# EAGLE board RPi_RN2483backup (EAGLE 7.6.0)
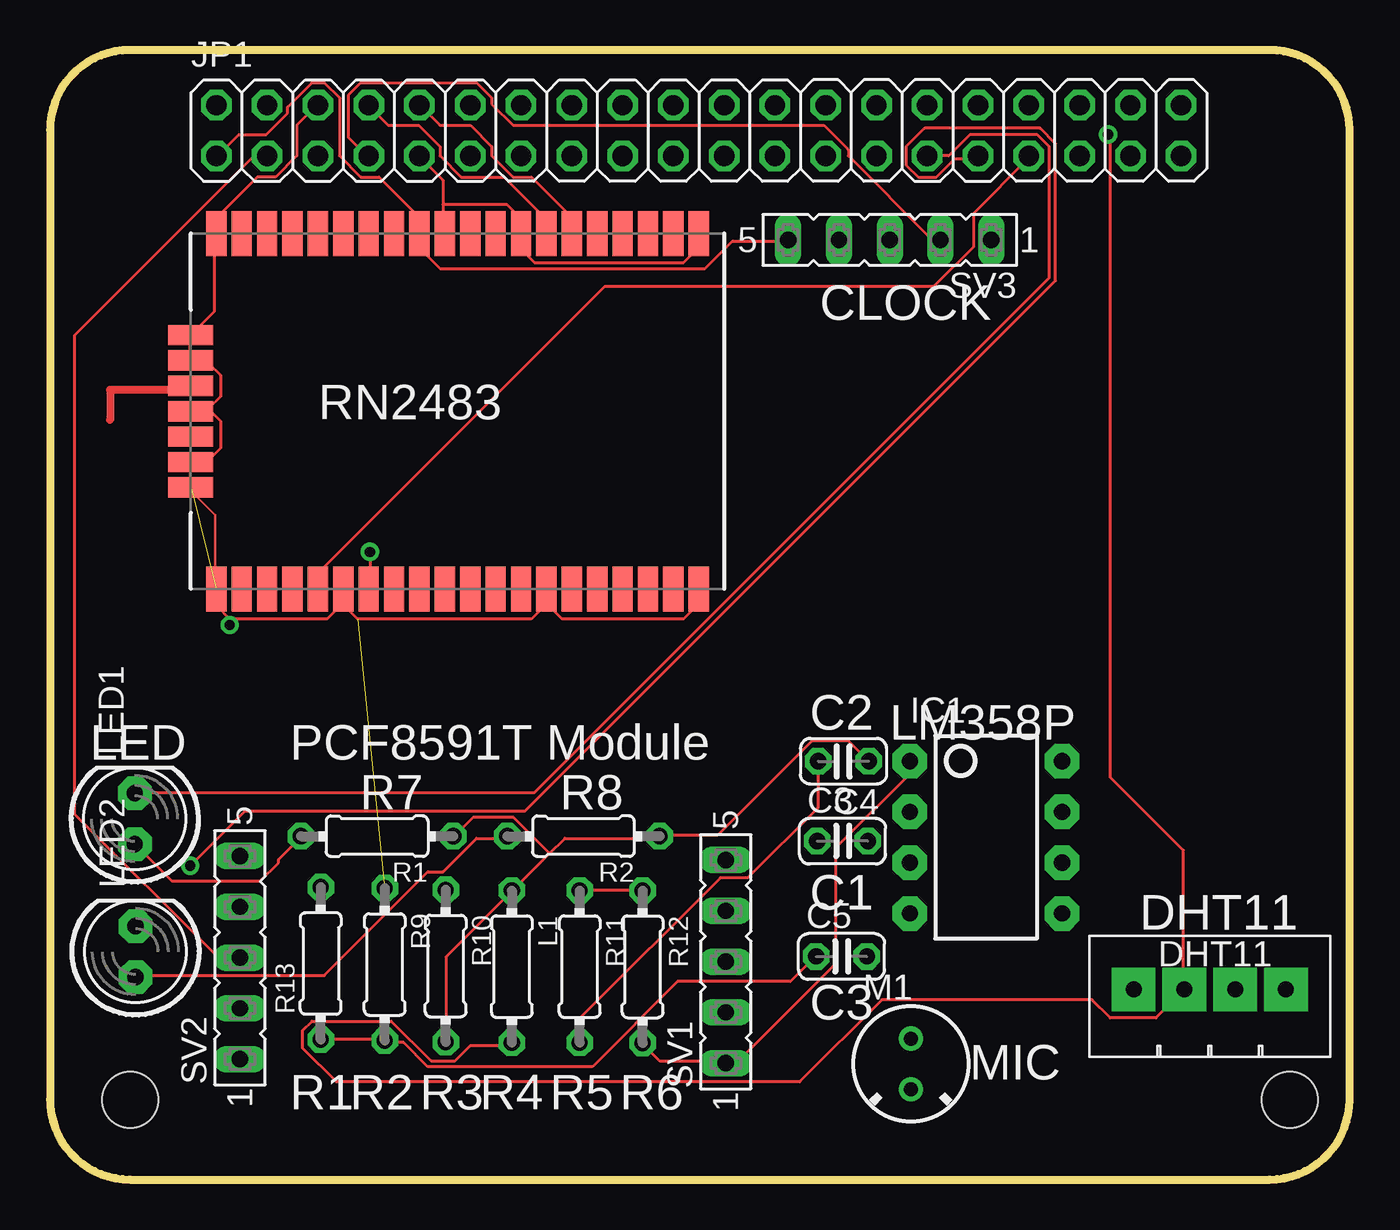
[diagram p0: board, top side]
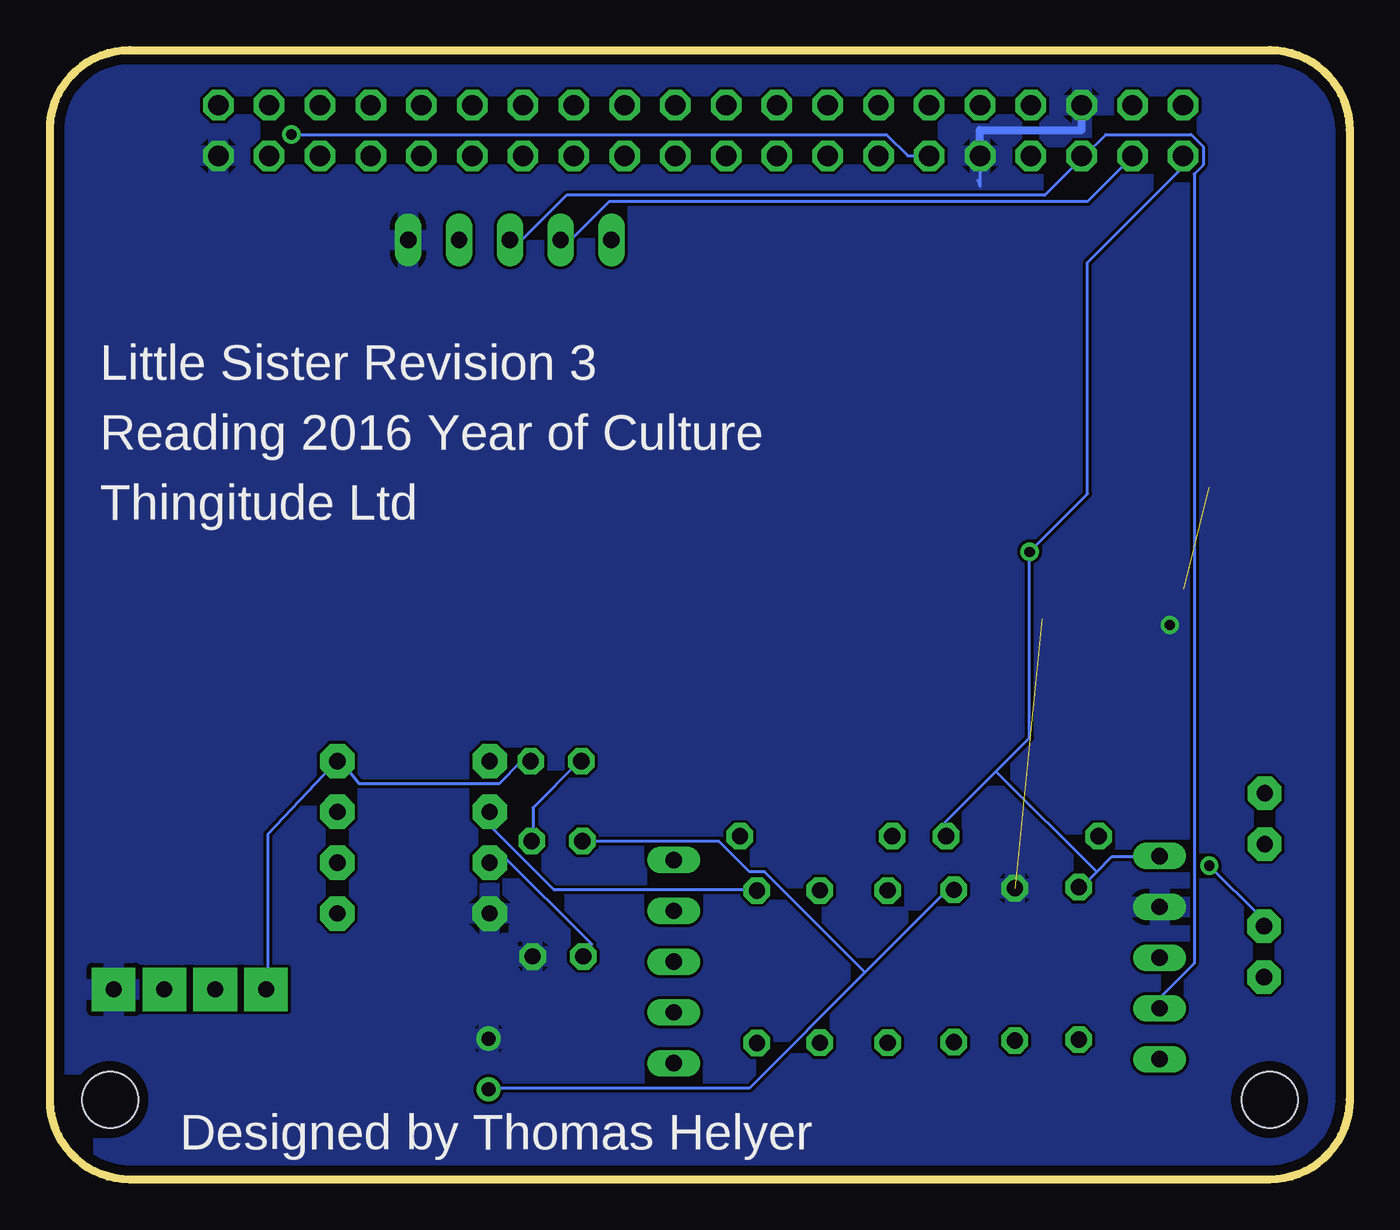
[diagram p1: board, bottom side, seen from below]

Size 65 x 56.5 mm. Coordinates in mm from the lower left corner, seen from the top.
Outline: 0,52.5 0,4 arc90 4,0 61,0 arc90 65,4 65,52.5 arc90 61,56.5 4,56.5 arc90 0,52.5
Copper layers (1*16): Top 0.035mm / dielectric 1.5mm / Bottom 0.035mm
Design rules "Ragworm": minimum track width 6mil, minimum drill 20mil, track to track 6mil, track to pad 6mil, pad to pad 6mil, via to via 6mil, smd to smd 6mil, copper to edge 20mil, drill to drill 8mil, minimum pad ring 10mil, minimum via ring 8mil, stop-mask expansion 4mil, vias tented up to drill 0mil, thermal gap 10mil
Holes 2.8 mm at 4,4 62,4

## Footprints (pad centres in the part's own frame; a part is rotated, then mirrored left to right if it is on the bottom)
C025-024X044 = drill 0.813 octagon: 1 -1.27,0; 2 1.27,0
DIP08 = drill 0.813 pad 1.727 octagon: 1 -3.81,-3.81; 2 -1.27,-3.81; 3 1.27,-3.81; 4 3.81,-3.81; 5 3.81,3.81; 6 1.27,3.81; 7 -1.27,3.81; 8 -3.81,3.81
2X20 = drill 1.016 octagon: 1 -24.13,-1.27; 2 -24.13,1.27; 3 -21.59,-1.27; 4 -21.59,1.27; 5 -19.05,-1.27; 6 -19.05,1.27; 7 -16.51,-1.27; 8 -16.51,1.27; 9 -13.97,-1.27; 10 -13.97,1.27; 11 -11.43,-1.27; 12 -11.43,1.27; 13 -8.89,-1.27; 14 -8.89,1.27; 15 -6.35,-1.27; 16 -6.35,1.27; 17 -3.81,-1.27; 18 -3.81,1.27; 19 -1.27,-1.27; 20 -1.27,1.27; 21 1.27,-1.27; 22 1.27,1.27; 23 3.81,-1.27; 24 3.81,1.27; 25 6.35,-1.27; 26 6.35,1.27; 27 8.89,-1.27; 28 8.89,1.27; 29 11.43,-1.27; 30 11.43,1.27; 31 13.97,-1.27; 32 13.97,1.27; 33 16.51,-1.27; 34 16.51,1.27; 35 19.05,-1.27; 36 19.05,1.27; 37 21.59,-1.27; 38 21.59,1.27; 39 24.13,-1.27; 40 24.13,1.27
0204/7 = drill 0.813 octagon: 1 -3.81,0; 2 3.81,0
LED5MM = drill 0.813 pad 1.676 octagon: A -1.27,0; K 1.27,0
F6050AP = drill 0.7 pad 1.2: 1 0,1.27; 2 0,-1.27
FE05-1 = drill 0.813 long: 1 -5.08,0; 2 -2.54,0; 3 0,0; 4 2.54,0; 5 5.08,0
RN2483 = smd 2.25 x 1.016: GND 17.78,1.27; GND2 17.78,10.16; GND3 17.78,13.97; GND4 17.78,25.4; GND10 0,25.4; GND11 0,19.05; GND12 0,8.89; GND13 0,1.27; GPIO0 0,16.51; GPIO1 0,15.24; GPIO2 0,13.97; GPIO3 0,12.7; GPIO4 0,11.43; GPIO5 0,10.16; GPIO6 0,6.35; GPIO7 0,5.08; GPIO8 0,3.81; GPIO9 0,2.54; GPIO10 17.78,17.78; GPIO11 17.78,16.51; GPIO12 17.78,12.7; GPIO13 17.78,11.43; NC1 17.78,19.05; NC2 17.78,20.32; NC3 17.78,21.59; NC4 17.78,22.86; NC5 17.78,24.13; NC6 0,24.13; NC7 0,7.62; RESERVED1 17.78,5.08; RESERVED2 17.78,6.35; RESET 0,20.32; TEST0 0,22.86; TEST1 0,21.59; UART_CTS 17.78,3.81; UART_RTS 17.78,2.54; UART_RX 17.78,8.89; UART_TX 17.78,7.62; VDD1 17.78,15.24; VDD2 0,17.78 | smd 1.016 x 2.25: GND5 12.7,26.67; GND6 11.43,26.67; GND7 8.89,26.67; GND8 6.35,26.67; GND9 5.08,26.67; RFH 10.16,26.67; RFL 7.62,26.67
DHT11-PION. = drill 0.8 pad 2.184 square: DATA -1.27,0.305; GND 3.81,0.305; NO 1.27,0.305; VCC -3.81,0.305

## Placement (x,y rotation side)
C3  [C025-024X044]  39.64,16.93 0 top
C4  [C025-024X044]  39.69,20.92 180 top
C5  [C025-024X044]  39.59,11.16 0 top
IC1  LM358  [DIP08]  46.82,17.12 270 top
JP1  [2X20]  32.45,52.47 0 top
L1  [0204/7]  23.1,10.65 270 top
LED1  [LED5MM]  4.24,18.05 90 top
LED2  [LED5MM]  4.28,11.4 90 top
M1  ELECTRET_MICROPHON-F6050AP  [F6050AP]  43.06,5.78 0 top
R1  [0204/7]  16.36,17.17 180 top
R2  [0204/7]  26.68,17.17 180 top
R9  [0204/7]  16.74,10.76 270 top
R10  [0204/7]  19.79,10.68 270 top
R11  [0204/7]  26.49,10.65 270 top
R12  [0204/7]  29.64,10.64 270 top
R13  [0204/7]  13.54,10.81 90 top
SV1  [FE05-1]  33.8,10.9 90 top
SV2  [FE05-1]  9.5,11.1 90 top
SV3  [FE05-1]  42,47 180 top
U$1  RN2483  [RN2483]  33.72,29.54 90 top
U$3  DHT11-PION.  [DHT11-PION.]  58.01,9.2 0 top

## Library data of the parts
C3-C5 L1 R1 R2 R9-R13 = resistor
IC1 = SparkFun-AnalogIC; PROD_ID: IC-09172
JP1 LED1 LED2 = adafruit
M1 = microphon
SV1-SV3 = con-lsta; OC_FARNELL: unknown; OC_NEWARK: unknown
U$1 = RN2483
U$3 = DHT11

## Nets
+3V3: C4.1 IC1.8 JP1.1 L1.1 R1.1 R2.1 R10.2 R13.2 SV2.5 SV3.5 U$1.VDD1 U$1.VDD2 U$3.VCC
GPIO5: JP1.29 LED1.K
GPIO6: JP1.31 LED2.K
GROUND: C5.2 IC1.4 JP1.6 JP1.9 JP1.39 M1.1 R9.1 SV2.4 SV3.1 U$1.GND U$1.GND2 U$1.GND3 U$1.GND4 U$1.GND5 U$1.GND6 U$1.GND7 U$1.GND8 U$1.GND9 U$1.GND10 U$1.GND11 U$1.GND12 U$1.GND13 U$3.GND
N$1: LED1.A R1.2
N$2: LED2.A R2.2
N$7: U$1.RFL
N$10: JP1.11 L1.2 U$3.DATA
N$12: IC1.2 R11.1 R12.1
N$13: JP1.33 U$1.RESET
N$15: JP1.5 SV2.2 SV3.3
N$16: JP1.3 SV2.3 SV3.4
N$18: IC1.1 R12.2 SV1.1
N$20: JP1.7 SV3.2
N$22: C3.1 M1.2 R10.1
N$23: C3.2 C4.2 R11.2
N$24: C5.1 IC1.3 R9.2 R13.1
RFH: U$1.RFH
UART_RX: JP1.8 U$1.UART_RX
UART_TX: JP1.10 U$1.UART_TX

## Tracks (layer width: path | path; a pad name or v marks a point on that pad's centre or on a via)
+3V3  (via drill 0.51)
  Top 0.152: JP1.1 8.38,51.21 9.45,52.27 10.82,52.27 11.89,53.34 11.89,53.65 13.11,54.86 13.72,54.86 14.48,54.1 14.48,51.21 15.54,50.14 16.46,50.14 18.44,48.16 18.44,47.4 U$1.VDD1 18.59,47.24 18.59,46.48 19.51,45.57 32.77,45.57 34.14,46.94 36.88,46.94 SV3.5 | R10.2 19.81,7.01 19.81,11.12 23.01,14.33 L1.1 23.16,14.48 24.99,16.31 | 24.99,16.31 25.76,17.07 30.48,17.07 R2.1 30.63,17.22 33.38,17.22 38.1,21.95 39.93,21.95 40.84,21.03 C4.1 | v16,31.39 16,29.57 U$1.VDD2 | 24.99,16.31 23.16,18.14 21.18,18.14 20.27,17.22 R1.1
  Bottom 0.152: 17.68,20.42 20.27,17.83 20.27,17.22 R1.1 | 17.68,20.42 16,22.1 v16,31.39 13.11,34.29 13.11,45.87 8.38,50.6 8.38,51.05 JP1.1 | 12.65,15.39 13.41,14.63 R13.2 | 12.65,15.39 11.89,16.15 9.6,16.15 SV2.5 | 17.68,20.42 12.65,15.39 | 50.54,21.07 50.6,20.88 IC1.8 50.54,21.07 | 50.54,21.07 49.53,19.81 42.52,19.81 41.45,20.88 41,20.88 C4.1 | 50.54,21.07 54.1,17.26 54.1,9.6 U$3.VCC
GPIO5
  Top 0.152: JP1.29 44.96,51.21 46.02,52.27 49.38,52.27 49.99,51.66 49.99,45.11 24.23,19.36 4.27,19.36 LED1.K
GPIO6  (via drill 0.51)
  Top 0.152: v7.01,15.7 9.75,18.44 23.77,18.44 50.29,44.96 50.29,51.82 49.53,52.58 43.74,52.58 42.82,51.66 42.82,50.75 43.43,50.14 44.35,50.14 45.26,51.05 46.33,51.05 JP1.31
  Bottom 0.152: v7.01,15.7 4.42,13.11 4.42,12.8 LED2.K
GROUND  (via drill 0.51)  (2 unrouted)
  Top 0.152: U$1.GND9 7.01,34.75 7.01,35.81 U$1.GND8 7.16,35.97 7.92,35.97 8.53,36.58 8.53,37.95 7.92,38.56 | U$1.GND 32.31,47.24 32.31,46.48 31.7,45.87 24.23,45.87 23.62,46.48 23.62,47.24 U$1.GND2 23.47,47.4 23.47,48.16 22.86,48.77 19.66,48.77 | 19.66,48.77 19.66,49.99 18.59,51.05 JP1.9 | 19.66,48.77 19.66,47.4 U$1.GND3 | 7.92,38.56 7.16,38.56 U$1.GND7 7.92,38.56 | 7.92,38.56 8.53,39.17 8.53,40.23 7.92,40.84 7.16,40.84 U$1.GND6 7.01,41 7.01,42.22 U$1.GND5 7.16,42.37 8.23,43.43 8.23,47.24 U$1.GND4 8.38,47.4 8.38,48.16 10.36,50.14 11.28,50.14 12.34,51.21 12.34,52.73 13.26,53.65 JP1.6 | 8.99,28.04 8.38,28.65 8.38,29.41 U$1.GND10 | 8.99,28.04 13.87,28.04 14.63,28.8 | 14.63,28.8 14.63,29.41 U$1.GND11 14.63,28.8 | 24.84,28.8 24.84,29.41 U$1.GND12 24.84,28.8 | 24.84,28.8 25.6,28.04 31.7,28.04 32.31,28.65 32.31,29.41 U$1.GND13 | 14.63,28.8 15.39,28.04 24.08,28.04 24.84,28.8 | v8.99,27.74 8.99,28.04
  Bottom 0.152: 18.59,49.99 18.51,49.75 | 18.51,49.75 18.48,49.68 | 18.51,49.75 18.5,49.75 18.5,51 JP1.9
  Bottom 0.406: JP1.9 18.5,51.2 18.5,52.5 13.4,52.5 JP1.6
  pour Bottom: 64.25,55.9 0.75,55.9 0.75,0.75 64.25,0.75
N$1
  Top 0.152: R1.2 12.5,17.07 11.43,16 11.43,15.85 10.52,14.94 6.1,14.94 4.27,16.76 LED1.A
N$2
  Top 0.152: R2.2 22.86,17.07 21.34,17.07 19.66,15.39 18.9,15.39 13.72,10.21 4.42,10.21 LED2.A
N$10  (via drill 0.51)
  Top 0.152: L1.2 23.01,6.71 21.03,6.71 20.27,5.94 19.05,5.94 17.07,7.92 13.11,7.92 12.65,7.47 12.65,6.55 14.33,4.88 37.49,4.88 41.6,8.99 52.12,8.99 53.03,8.08 55.32,8.08 56.69,9.45 U$3.DATA 56.69,9.6 56.69,16.47 53.03,20.12 53.03,51.96 52.93,52.32 v52.93,52.27
  Bottom 0.152: v52.93,52.27 23.16,52.27 22.1,51.21 JP1.11
N$12
  Top 0.152: R12.1 29.57,14.48 26.52,14.48 R11.1
  Bottom 0.152: IC1.2 42.98,18.29 42.98,17.68 39.78,14.48 29.72,14.48 R12.1
N$13
  Top 0.152: U$1.RESET 13.41,29.57 13.41,30.33 27.74,44.65 44.2,44.65 46.18,46.63 46.18,48.31 48.92,51.05 JP1.33
N$14
  Bottom 1.016: 13.45,53.7 13.4,53.7
N$15
  Bottom 0.152: SV2.2 9.45,8.69 9.45,9.14 7.77,10.82 7.77,50.29 7.32,50.75 7.32,51.66 7.92,52.27 12.19,52.27 13.26,51.21 JP1.5 13.41,51.05 15.24,49.23 39.17,49.23 41.3,47.09 41.91,47.09 SV3.3
N$16
  Top 0.152: SV2.3 9.45,11.12 8.38,11.12 1.22,18.29 1.22,42.22 10.06,51.05 10.82,51.05 JP1.3
  Bottom 0.152: SV3.4 39.32,47.09 38.86,47.09 37.03,48.92 13.11,48.92 10.97,51.05 JP1.3
N$17
  Top 0.128: 8.25,29.5 8.25,33.25 7,34.5 7,34.75
N$18
  Top 0.152: R12.2 29.72,6.71 30.48,5.94 33.68,5.94 SV1.1 33.83,5.94 34.44,5.94 39.32,10.82 39.32,16.61 42.98,20.27 42.98,20.88 IC1.1
N$20
  Top 0.152: SV3.2 44.5,47.09 44.04,47.09 39.93,51.21 39.93,51.51 38.71,52.73 23.16,52.73 22.1,53.8 22.1,54.1 21.34,54.86 15.54,54.86 14.94,54.25 14.94,52.12 15.85,51.21 JP1.7
N$21
  Top 0.406: 7,39.5 3,39.5 3,38
N$22
  Bottom 0.152: 24.23,10.36 20.12,14.48 19.81,14.48 R10.1 | 24.23,10.36 30.02,4.57 42.98,4.57 M1.2 | 24.23,10.36 29.26,15.39 30.02,15.39 31.55,16.92 38.25,16.92 C3.1
N$23
  Top 0.152: R11.2 26.52,6.86 26.52,8.08 33.53,15.09 34.9,15.09 38.41,18.59 38.41,20.88 C4.2
  Bottom 0.152: C3.2 40.84,17.07 40.84,18.59 38.56,20.88 C4.2
N$24
  Top 0.152: R13.1 13.56,7.01 16.61,7.01 R9.2 16.76,6.86 17.68,6.86 18.9,5.64 27.13,5.64 31.39,9.91 37.03,9.91 38.25,11.12 C5.1
  Bottom 0.152: C5.1 37.91,11.78 42.48,16.35 IC1.3
UART_RX
  Top 0.152: U$1.UART_RX 24.69,47.4 24.69,48.16 22.71,50.14 20.57,50.14 19.51,51.21 19.51,51.66 18.44,52.73 16.92,52.73 16,53.65 JP1.8
UART_TX
  Top 0.152: U$1.UART_TX 26.06,47.4 26.06,48.16 24.08,50.14 23.16,50.14 22.1,51.21 22.1,51.66 21.03,52.73 19.51,52.73 18.59,53.65 JP1.10

## Text on the board
tPlace: CLOCK | RN2483 | C2 | LM358P | LED | PCF8591T Module | R7 | R8 | C1 | DHT11 | C3 | MIC | R1 | R2 | R3 | R4 | R5 | R6
bPlace: Little Sister Revision 3 | Reading 2016 Year of Culture | Thingitude Ltd | Designed by Thomas Helyer